# Altium PCB 2113A_DeElectronique.PcbDoc
Units mm, origin at the board's own origin, x right, y up, seen from the top; angles counter-clockwise.
Board outline 70 x 49 mm, 2 copper layers (Top Layer, Bottom Layer); 36 components, 32 nets, 120 pads, 28 vias.
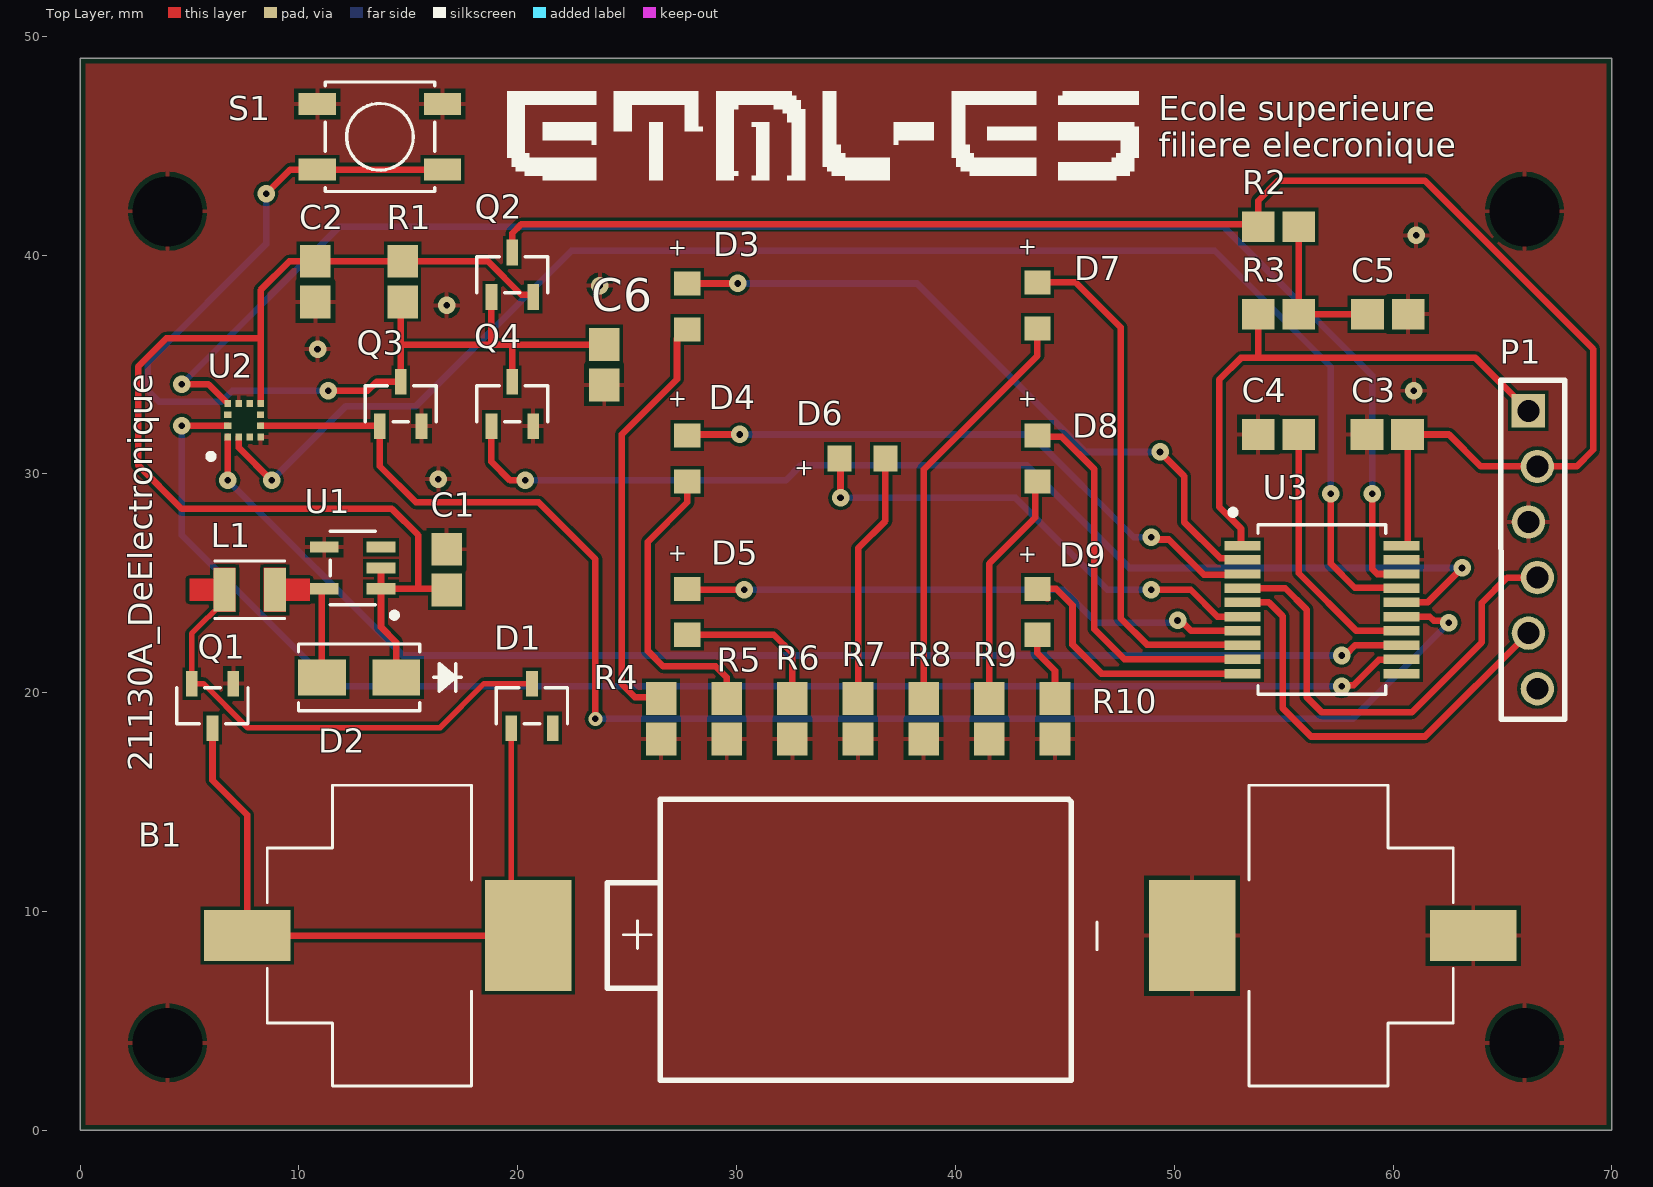
[diagram p0: Top Layer view]
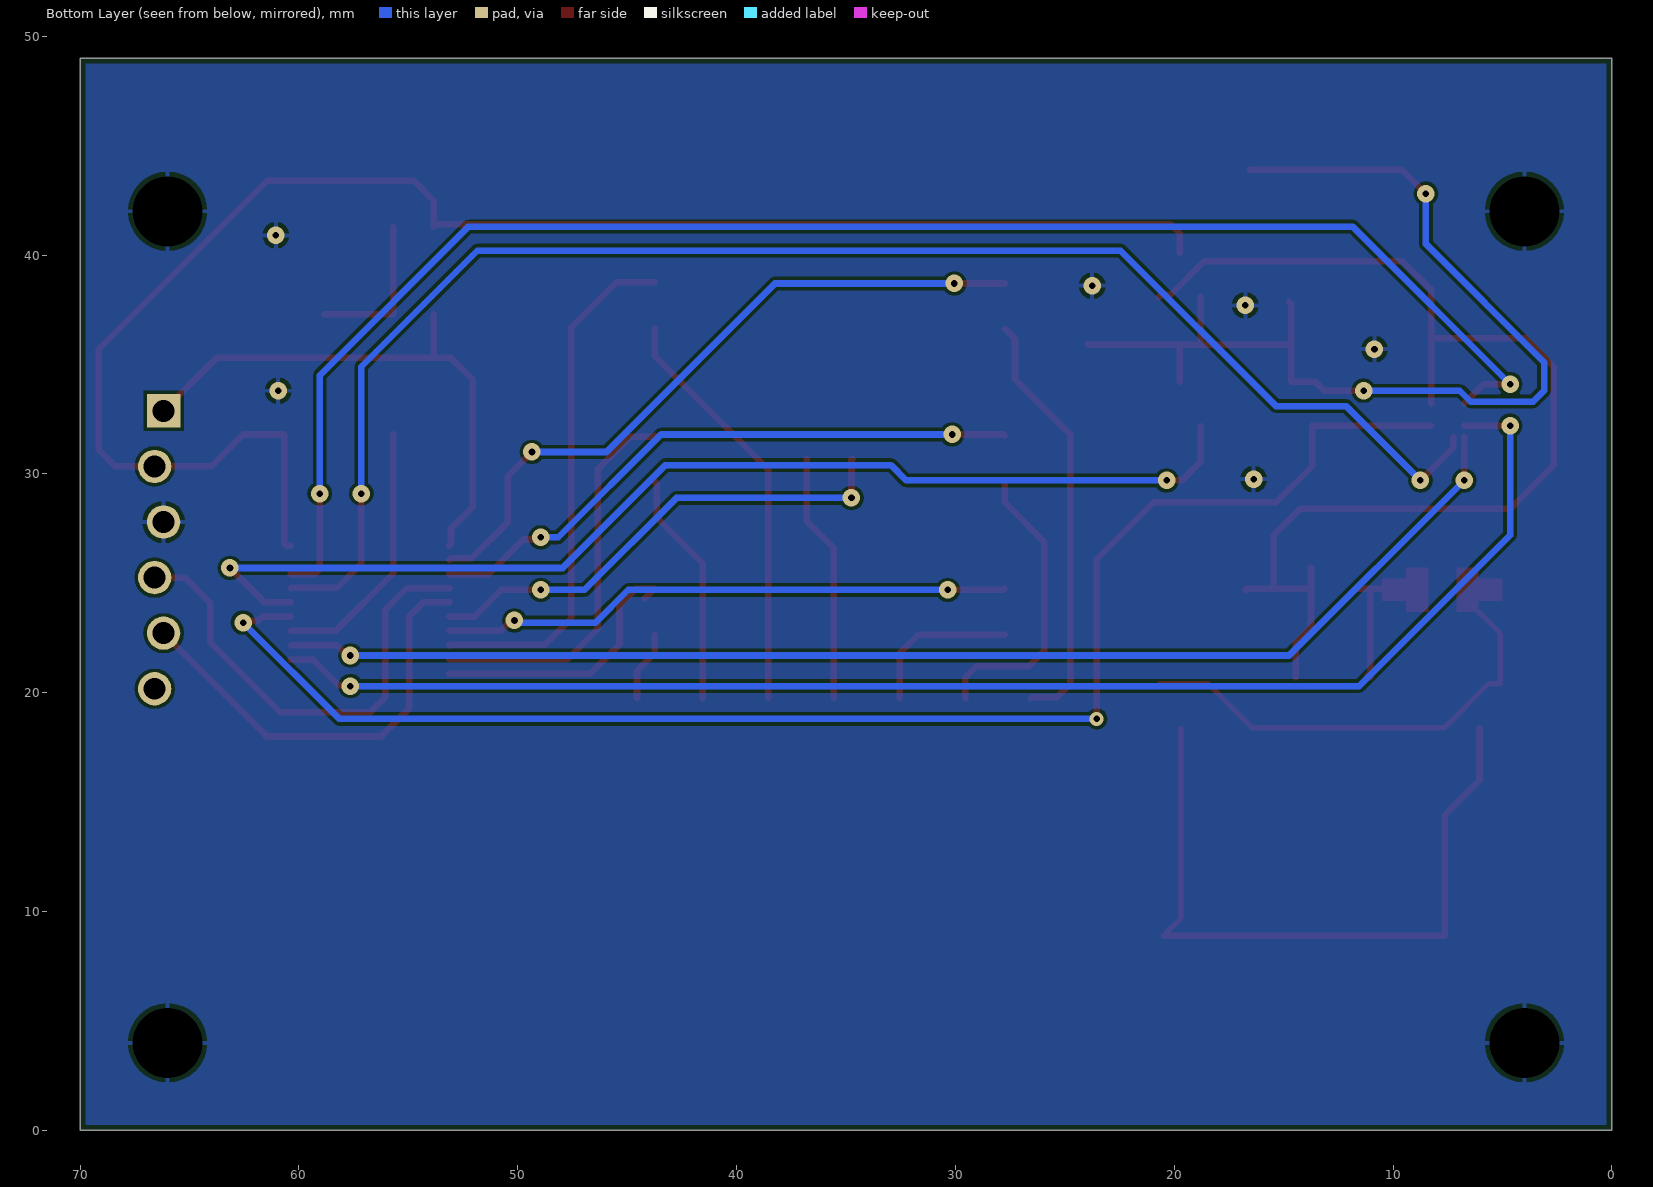
[diagram p1: Bottom Layer view, seen from below]

## Layer stack, top to bottom
Top Solder: solder mask 0.0102, Solder Resist, Dk 3.5
Top Layer: signal copper 0.0356
Dielectric 1: dielectric 0.32, FR-4, Dk 4.8
Bottom Layer: signal copper 0.0356
Bottom Solder: solder mask 0.0102, Solder Resist, Dk 3.5

## Board outline
0,0 70,0 70,49 0,49

## Design rules (kind name [scope] priority, off if disabled: settings)
BoardOutlineClearance [All] p1: gap=0.25 ignorepadtopadclearanceinfootprint=FALSE except(0: Arc-SplitContinuation Track-SplitContinuation SMDPad-SplitContinuation THPad-SplitContinuation Via-SplitContinuation Fill-SplitContinuation Poly-SplitContinuation Region-SplitContinuation Text-SplitContinuation)
Clearance Clearance-xPP-xTP-xTT [All] p1: gap=0.15 ignorepadtopadclearanceinfootprint=FALSE except(0: Arc-Hole Track-Hole SMDPad-Hole THPad-Hole Via-Hole Fill-Hole Poly-Hole Region-Hole Text-Hole)
ComponentClearance [All] p1: gap=0.25 collisioncheckmode=3 verticalgap=0.25 showdistances=FALSE
DiffPairsRouting [All] p1: maxlimit=0.25 minlimit=0.25 mostfreqgap=0.25 toplayer_minwidth=0.381 toplayer_maxwidth=0.381 toplayer_prefwidth=0.381 bottomlayer_minwidth=0.381 bottomlayer_maxwidth=0.381 bottomlayer_prefwidth=0.381 maxuncoupledlength=12.5
Height [All] p1: minheight=0 maxheight=25 prefheight=12.5
HoleSize HoleSize-PTH [All] p1: absolutevalues=TRUE maxlimit=10 minlimit=0.25 maxpercent=80.000 minpercent=20.000
HoleToHoleClearance [All] p1: gap=0.35 allowstackedmicrovias=TRUE
MinimumAnnularRing "Minimum IAR  >0.45mm" [((ObjectKind = 'Pad') OR (ObjectKind = 'Via')) And (Layer = 'MultiLayer') And (HoleDiameter > AsMM(0.45))] p1: minimumring=0.175 // minimum inner annular ring for pads > 0.45mm finished hole size
MinimumAnnularRing "Minimum IAR <=0.45mm" [((ObjectKind = 'Pad') OR (ObjectKind = 'Via')) And (Layer = 'MultiLayer') And (HoleDiameter <= AsMM(0.45))] p2: minimumring=0.175 // minimum inner annular ring for pads <= 0.45mm finished hole size
MinimumSolderMaskSliver [All] p1: minsoldermaskwidth=0.08
PlaneClearance PlaneClearance-IPI [All] p1: clearance=0.25
PlaneConnect [All] p1: planeconnectstyle=Relief reliefexpansion=0.175 reliefentries=4 reliefconductorwidth=0.2 reliefairgap=0.2
PolygonConnect PolygonConnect-xTW [All] p1: connectstyle=Relief reliefconductorwidth=0.2 reliefentries=4 polygonreliefangle="90 Angle" airgapwidth=0.2
RoutingCorners [All] p1: cornerstyle=45-Degree minsetback=2.5 maxsetback=2.5
RoutingVias RoutingViasES [All] p1: holewidth=0.3 width=0.65 viastyle="Through Hole" minholewidth=0.25 minwidth=0.61 maxholewidth=0.45 maxwidth=0.8 // finishet hole size <= 0.45mm
SilkToSilkClearance [All] p1: silktosilkclearance=0.2
SilkToSolderMaskClearance SilkscreenOverComponentPads [IsPad] p1: minsilkscreentomaskgap=0.2 clearancetoexposedcopper=TRUE
SolderMaskExpansion [All] p1: expansion=0 istentingtop=FALSE
UnRoutedNet [All] p1: checkbadconnections=TRUE
Width Width-xTW [All] p1: maxlimit=1.5 minlimit=0.15 preferedwidth=0.2
18 further rules are at their usual default settings.

## Components (designator, comment, footprint, x,y, rotation, side; value= is the part's Value field where it differs from the comment)
B1 "BK-53" BK-53 35.65,8.9 r90 top
C1 "2.2uF" CONDO_0805 16.75,25.64 r90 top
C2 "100nF" CONDO_0805 10.75,38.775 r270 top
C3 "100nF" CONDO_0805 59.75,31.8 r0 top
C4 "10uF" CONDO_0805 54.75,31.8 r180 top
C5 "100nF" CONDO_0805 59.75,37.3 r180 top
C6 "10uF" Condo_0805 23.95,35 r90 top
D1 "BAT54_R1_00001" SOT23-3 20.65,19.4 r0 top
D2 "SS13-E3/61T" DO-214AC 12.75,20.7 r180 top
D3 "LED" LED_0805 27.751,37.651 r90 top
D4 "LED" LED_0805 27.75,30.7 r90 top
D5 "LED" LED_0805 27.75,23.7 r90 top
D6 "LED" LED_0805 35.75,30.7 r180 top
D7 "LED" LED_0805 43.75,37.7 r90 top
D8 "LED" LED_0805 43.75,30.7 r90 top
D9 "LED" LED_0805 43.75,23.7 r90 top
L1 "560uH" "self 1206 (3225)" 7.75,24.7 r180 top
P1 "Tac_Contact_Prog" TAC_CONTACT_PROG 66.185,32.88 r0 top
Q1 "PMV160UP,215" SOT23-3 6.05,19.4 r180 top
Q2 "PMV160UP,215" SOT23-3 19.75,39.1 r0 top
Q3 "DMN2114SN-7" SOT23-3 14.65,33.2 r0 top
Q4 "DMN2114SN-7" SOT23-3 19.75,33.2 r0 top
R1 "100k" RES_0805 14.75,38.8 r90 top
R2 "10k" RES_0805 54.75,41.3 r180 top
R3 "1k" RES_0805 54.75,37.3 r180 top
R4 "560" RES_0805 26.55,18.8 r270 top
R5 "560" RES_0805 29.55,18.8 r270 top
R6 "560" RES_0805 32.55,18.8 r270 top
R7 "560" RES_0805 35.55,18.8 r270 top
R8 "560" RES_0805 38.55,18.8 r270 top
R9 "560" RES_0805 41.55,18.8 r270 top
R10 "560" RES_0805 44.55,18.8 r270 top
S1 "PTS647SN50SMTR2LFS" PTS647SN50SMTR2LFS 13.7,45.405 r0 top
U1 "R1210N331D-TR-FE" SOT23-5 12.455,25.7 r180 top
U2 "MC3419" MC3419 7.499,32.45 r90 top
U3 "PIC32MM0064GPL020-I/SS" SSOP20_SS_MCH 56.75,23.8 r0 top

## Footprints (in the part's own frame and the unit in brackets; to place one, negate y for a bottom-side part, rotate by r counter-clockwise, add the part's x,y. Pads: shape width x height; smd on the part's side, far side on the other; paste and mask are expansions set on the pad)
BK-53 [mm]
  rect 2.34x3.96 smd: 1+(0,28.015) 2-(0,-28.015)
  rect 5.08x3.96 smd: 1-(0,-15.165) 2+(0,15.165)
  silkscreen extent -6.88,-27.1 6.88,27.1, body extent -6.88,-30.21 6.88,30.34, height 15.59
CONDO_0805 [mm]
  rect 1.5x1.4 smd: 1(-0.94,0) 2(0.914,0)
  body extent -1.1,-0.72 1.1,0.72, height 1.4
Condo_0805 [mm]
  rect 1.5x1.4 smd: 1(-0.94,0) 2(0.914,0)
  body extent -1.1,-0.72 1.1,0.72, height 1.4
DO-214AC [mil] "DO-214AC"
  rect 86x65 smd: 1(-67,0) 2(67,0)
  silkscreen extent -184,-60 109,60
LED_0805 [mm]
  rect 1.1x1.2 smd: 1(-1.051,0.001) 2(1.049,0.001)
  body extent -1,-0.62 1,0.63, height 0.7
MC3419 [mil] "Accéléromètres Small Digital 3-axis Accelerometer Sensor"
  rect 13x12 smd: 1(-30,29.53) 2(-30,9.84) 3(-30,-9.84) 4(-30,-29.53) 7(30,-29.53) 8(30,-9.84) 9(30,9.84) 10(30,29.53)
  rect 12x13 smd: 5(-9.84,-29.5) 6(9.84,-29.5) 11(9.84,29.5) 12(-9.84,29.5)
  silkscreen extent -70,55 -60,65, body extent -39,-39 39,39, height 39
PTS647SN50SMTR2LFS [mil] "Interrupteurs de contact 50mA 12VDC, 1.0N 5.0mm H, G leads"
  rect 67x39 smd paste+0 mask+0: 1(-112.49,59.06) 2(112.51,59.06) 3(-112.49,-59.05) 4(112.51,-59.05)
  silkscreen extent -98,-98 99,99, body extent -126,-88 130,90, height 197
RES_0805 [mm]
  rect 1.5x1.4 smd: 1(-0.94,0) 2(0.914,0)
  body extent -1.1,-0.72 1.1,0.72, height 1.4
"self 1206 (3225)" [mm] "Inductance fixes 560uH 10%"
  rect 1x2 smd: 1(-1.15,0) 2(1.15,0)
  Top Layer region: -0.65,-1 -1.65,-1 -1.65,-0.5 -2.75,-0.5 -2.75,0.5 -1.65,0.5 -1.65,1 -0.65,1
  Top Layer region: 1.65,0.5 2.75,0.5 2.75,-0.5 1.65,-0.5 1.65,-1 0.65,-1 0.65,1 1.65,1
  silkscreen extent -1.6,-1.31 1.6,1.31, body extent -1.6,-1.28 1.6,1.22, height 2.2
SOT23-3 [mil]
  rect 21x46 smd: 1(-37.5,-40) 2(37.5,-40) 3(0,40)
  silkscreen extent -64,-32 64,32, body extent -59,-49 59,49, height 43
SOT23-5 [mil]
  rect 52x20 smd: 1(-51,37.4) 2(-51,0) 3(-51,-37.4) 4(51,-37.4) 5(51,37.4)
  silkscreen extent -80,-66 41,90, body extent -63,-61 63,61, height 57
SSOP20_SS_MCH [mil]
  rect 65x17 smd: 1(-143,115.16) 2(-143,89.57) 3(-143,63.98) 4(-143,38.39) 5(-143,12.8) 6(-143,-12.8) 7(-143,-38.39) 8(-143,-63.98) 9(-143,-89.57) 10(-143,-115.16) 11(143,-115.16) 12(143,-89.57) 13(143,-63.98) 14(143,-38.39) 15(143,-12.8) 16(143,12.8) 17(143,38.39) 18(143,63.98) 19(143,89.57) 20(143,115.16)
  silkscreen extent -165,-152 115,180, body extent -161,-147 162,147, height 79
TAC_CONTACT_PROG [mil]
  rect 60x60 hole 39.37: 1(0,0)
  round 60 hole 39.37: 2(16,-100) 3(0,-200) 4(16,-300) 5(0,-400) 6(16,-500)
  silkscreen extent -50,-555 65,55

## Part data
B1: "BATT CONTACT CLIP AA 1 CELL SMD", Manufacturer="MPD (Memory Protection Devices)", ManufacturerPart=BK-53, Supplier=Digi-Key, SupplierPart=BK-53-ND
C1: library part Condensateur_Pol, Manufacturer="Samsung Electro-Mechanics", ManufacturerPart=CL21B225KPFNNNG, Supplier=Mouser, SupplierPart=187-CL21B225KPFNNNG
C2 C3 C5: library part Condensateur, Manufacturer=KEMET, ManufacturerPart=C0805C104K5RAC7411, Supplier=Mouser, SupplierPart=80-C0805C104K5RACLR
C4 C6: library part Condensateur, Manufacturer="Samsung Electro-Mechanics", ManufacturerPart=CL21A106KOCLRNC, Supplier=Mouser, SupplierPart=187-CL21A106KOCLRNC
D1: Manufacturer=Panjit, ManufacturerPart=BAT54_R1_00001, Supplier=Mouser, SupplierPart=241-BAT54_R1_00001
D2: library part Schottky, Manufacturer=Vishay, ManufacturerPart=SS13-E3/61T, Supplier=Mouser, SupplierPart=625-SS13-E3
D3 D4 D5 D6 D7 D8 D9: "DEL standard - CMS 2.0X1.2MM LOW CRNT", Manufacturer=Kingbright, ManufacturerPart=APT2012LSECK/J3-PRV, Supplier=Mouser, SupplierPart=604-APT2012LSECKJ3RV
L1: library part Self, Manufacturer="Murata Electronics", ManufacturerPart=LQH32CN561K23L, Supplier=Mouser, SupplierPart=81-LQH32CN561K23L
P1: "Tac contact pour programmation"
Q1 Q2: library part MOSFET-P, Manufacturer=Nexperia, ManufacturerPart=PMV160UP,215, Supplier=Mouser, SupplierPart=771-PMV160UP215
Q3 Q4: library part MOSFET-N, Manufacturer="Diodes Incorporated", ManufacturerPart=DMN2114SN-7, Supplier=Mouser, SupplierPart=621-DMN2114SN-7
R1: library part Résistance, Manufacturer="Vishay / Beyschlag", ManufacturerPart=MCS04020D1003BE000, Supplier=Mouser, SupplierPart=594-MCS04020D1003BE0
R2: library part Résistance, Manufacturer="Stackpole Electronics Inc", ManufacturerPart=RMCF0805JT10K0, Supplier=Digi-Key, SupplierPart=RMCF0805JT10K0CT-ND
R3: library part Résistance, Manufacturer="Stackpole Electronics Inc", ManufacturerPart=RNCP0805FTD1K00, Supplier=Digi-Key, SupplierPart=RNCP0805FTD1K00CT-ND
R4 R5 R6 R7 R8 R9 R10: library part Résistance, Manufacturer=Panasonic, ManufacturerPart=ERA-6AED561V, Supplier=Mouser, SupplierPart=667-ERA-6AED561V
S1: library part Bouton, "Interrupteurs de contact 50mA 12VDC, 1.0N 5.0mm H, G leads", Manufacturer=C&K, ManufacturerPart=PTS647SN50SMTR2LFS, Supplier=Mouser, SupplierPart=611-PTS647SN50SMTR2L
U1: "Régulateurs de tension de commutation 8V Input PWM Step-up DCDC Converter", Manufacturer="Ricoh Electronic Devices Company", ManufacturerPart=R1210N331D-TR-FE, Supplier=Digi-Key, SupplierPart=2129-R1210N331D-TR-FECT-ND
U2: "Accéléromètres Small Digital 3-axis Accelerometer Sensor", Manufacturer=MEMSIC, ManufacturerPart=MC3419, Supplier=Mouser, SupplierPart=498-MC3419
U3: "Microcontrôleurs 32 bits - MCU 8KB RAM 79 Power microMIPS", Manufacturer=MicroChip, ManufacturerPart=PIC32MM0064GPL020-I/SS, Supplier=Mouser, SupplierPart=579-MM0064GPL020ISS

## Free pads (board coordinates)
  round 0 hole 3.2: 1(66,4) 2(4,4) 3(4,42) 4(66,42)

## Via types
v1: diameter 0.8, hole 0.3, Top Layer to Bottom Layer, 27 vias
v2: diameter 0.65, hole 0.3, Top Layer to Bottom Layer, 1 vias

## Nets (pads, with @x,y where several pads share a name; then routed paths per layer and width w, separated by ;. In a path a pad name is that pad's centre, name@x,y a point inside that pad or via, vN(x,y) a via of type N, cw(c..) or ccw(c..) an arc to the next point about the centre after c; other vN are vias at no path point)
GND: B1.1- B1.2- C1.2 C2.2 C3.1 C4.2 C5.1 C6.1 P1.3 pad.1 pad.2 pad.3 pad.4 Q1.1 Q3.2 Q4.2 R4.2 R5.2 R6.2 R7.2 R8.2 R9.2 R10.2 S1.1 S1.2 U1.4 U2.4 U2.9 U3.19
  other v1: 16.373,29.758 60.95,33.8 10.85,35.7 16.75,37.7 23.75,38.6 61.05,40.9
NetC4_1: C4.1 U3.14 | length 12.1
  Top Layer w0.3: C4.1 55.69,25.46 58.325,22.825 U3.14
NetC5_2: C5.2 R2.1 R3.1 | length 7.1
  Top Layer w0.3: R2.1 R3.1 C5.2
NetC6_2: C6.2 Q2.1 Q3.3 Q4.3 R1.1 S1.3 S1.4 | length 48.8
  Top Layer w0.3: v1(8.5,42.8) 9.605,43.905 S1.3 S1.4 ; v1(11.35,33.8) 13.15,33.8 13.55,34.2 14.634,34.2 Q3.3 14.65,35.9 ; R1.1 14.65,37.76 14.65,35.9 ; Q2.1 18.798,35.9 ; Q4.3 19.75,35.8 19.65,35.9 ; C6.2 23.936,35.9 19.65,35.9 ; 14.65,35.9 18.798,35.9 ; 18.798,35.9 19.45,35.9 19.65,35.9
  Bottom Layer w0.3: v1(8.5,42.8) 8.5,40.5 3.1,35.1 3.1,33.8 3.6,33.3 6.45,33.3 6.95,33.8 v1(11.35,33.8)
NetD1_3: D1.3 L1.2 Q1.2 | length 22.1
  Top Layer w0.254: L1.2 6.6,24.2 5.098,22.698 Q1.2 5.634,20.416 7.65,18.4 16.45,18.4 18.466,20.416 D1.3
  Top Layer w0.3: L1.2@6.836,24.7 L1.2@6.85,24.686
NetD2_2: D2.2 L1.1 U1.5 | length 7.1
  Top Layer w0.3: L1.1@8.69,24.7 8.74,24.75 U1.5@11.152,24.75 ; D2.2@11.148,20.8 D2.2 11.048,24.646 U1.5@11.152,24.75 ; U1.5@11.566,24.75 U1.5 U1.5@11.152,24.75
NetD3_1: D3.1 R4.1 | length 19.5
  Top Layer w0.3: R4.1 26.49,19.8 25.35,19.8 24.75,20.4 24.75,31.8 27.277,34.327 27.277,36.177 27.7,36.6 D3.1
NetD3_2: D3.2 U3.2 | length 31.8
  Top Layer w0.3: D3.2 v1(30.05,38.7) ; v1(49.35,31) 50.45,29.9 50.45,27.8 52.11,26.14 53.053,26.14 U3.2
  Bottom Layer w0.3: v1(30.05,38.7) 38.25,38.7 45.95,31 v1(49.35,31)
NetD4_1: D4.1 R5.1 | length 13.6
  Top Layer w0.3: D4.1 27.749,28.699 25.95,26.9 25.95,21.9 26.65,21.2 29.05,21.2 29.55,20.7 R5.1
NetD4_2: D4.2 U3.3 | length 28.1
  Top Layer w0.3: D4.2 27.801,31.8 v1(30.15,31.8) ; v1(48.95,27.1) 49.048,27.002 49.748,27.002 51.35,25.4 53.093,25.4 U3.3
  Bottom Layer w0.3: v1(30.15,31.8) 43.45,31.8 48.15,27.1 v1(48.95,27.1)
NetD5_1: D5.1 R6.1 | length 7.2
  Top Layer w0.3: D5.1 31.701,22.649 32.55,21.8 R6.1
NetD5_2: D5.2 U3.7 | length 26.3
  Top Layer w0.3: D5.2 27.798,24.7 v1(30.35,24.7) ; v1(50.15,23.3) 50.298,23.3 50.773,22.825 U3.7
  Bottom Layer w0.3: v1(30.35,24.7) 44.95,24.7 46.45,23.2 50.05,23.2 v1@50.12,23.27 ; v1@50.125,23.266 50.15,23.291 v1(50.15,23.3)
NetD6_1: D6.1 R7.1 | length 11.5
  Top Layer w0.3: R7.1 35.55,26.6 36.801,27.851 D6.1
NetD6_2: D6.2 U3.6 | length 22.4
  Top Layer w0.3: D6.2 34.75,30.651 v1(34.75,28.9) ; v1(48.95,24.7) 50.75,24.7 51.975,23.475 U3.6
  Bottom Layer w0.3: v1(34.75,28.9) 42.75,28.9 46.95,24.7 v1(48.95,24.7)
NetD7_1: D7.1 R8.1 | length 19.1
  Top Layer w0.3: R8.1 38.55,30.2 43.749,35.399 D7.1
NetD7_2: D7.2 U3.8 | length 24
  Top Layer w0.3: D7.2 45.501,38.749 47.55,36.7 47.55,23.4 48.75,22.2 53.093,22.2 U3.8
NetD8_1: D8.1 R9.1 | length 10.8
  Top Layer w0.3: R9.1 41.55,25.9 43.65,28 43.65,29.549 D8.1
NetD8_2: D8.2 U3.9 | length 17.9
  Top Layer w0.3: D8.2 43.798,31.7 44.85,31.7 46.35,30.2 46.35,22.9 47.725,21.525 U3.9
NetD9_1: D9.1 R10.1 | length 3.2
  Top Layer w0.3: D9.1 43.749,21.801 44.55,21 R10.1
NetD9_2: D9.2 U3.10 | length 12.7
  Top Layer w0.3: D9.2@44.222,24.326 44.172,24.326 D9.2 44.601,24.749 45.35,24 45.35,22.2 46.675,20.875 U3.10
NetP1_1: P1.1 R3.2 U3.1 | length 25.6
  Top Layer w0.3: U3.1 53.118,26.746 53.05,26.814 53.05,27.5 52.05,28.5 52.05,34.3 53.05,35.3 53.836,35.3 ; R3.2 53.836,35.3 ; P1.1 63.765,35.3 53.836,35.3
NetP1_4: P1.4 U3.4 | length 21.8
  Top Layer w0.3: U3.4 55.075,24.775 56.05,23.8 56.05,19.8 56.75,19.1 60.85,19.1 64.05,22.3 64.05,24.1 65.21,25.26 P1.4
NetP1_5: P1.5 U3.5 | length 20
  Top Layer w0.3: U3.5 54.325,24.125 54.95,23.5 54.95,19.3 56.25,18 61.465,18 P1.5
NetQ3_1: Q3.1 U2.5 U3.15 | length 69.4
  Top Layer w0.3: U2.5 8.57,32.2 13.682,32.2 Q3.1 13.698,30.352 15.35,28.7 20.95,28.7 23.55,26.1 v2(23.55,18.8) ; U3.15 61.675,23.475 61.854,23.296 62.454,23.296 v1(62.55,23.2)
  Bottom Layer w0.3: v2(23.55,18.8) 58.15,18.8 62.494,23.144 62.616,23.144 62.561,23.2 v1(62.55,23.2)
NetQ4_1: Q4.1 U3.16 | length 52
  Top Layer w0.3: Q4.1 18.798,30.553 19.65,29.7 v1(20.35,29.7) ; U3.16 61.575,24.125 v1(63.15,25.7)
  Bottom Layer w0.3: v1(20.35,29.7) 32.25,29.7 32.95,30.4 43.25,30.4 47.95,25.7 v1(63.15,25.7)
NetU2_1: U2.1 U3.13 | length 59.1
  Top Layer w0.3: v1(6.75,29.7) U2.1@6.75,31.688 ; v1(57.65,21.7) 57.798,21.7 58.273,22.175 U3.13
  Bottom Layer w0.3: v1(6.75,29.7) 14.75,21.7 v1(57.65,21.7)
NetU2_2: U2.2 U3.17 | length 70.4
  Top Layer w0.3: U2.2@7.258,31.68 7.258,31.192 v1(8.75,29.7) ; v1(57.15,29.1) 57.15,29 57.05,28.9 57.098,28.9 57.15,28.848 57.15,25.9 58.25,24.8 60.357,24.8 U3.17
  Bottom Layer w0.3: v1(8.75,29.7) 12.15,33.1 15.35,33.1 22.45,40.2 51.85,40.2 57.15,34.9 v1(57.15,29.1)
NetU2_10: U2.10 U3.18 | length 72.9
  Top Layer w0.3: v1(4.65,34.1) 5.861,34.1 6.711,33.25 6.724,33.25 6.749,33.225 U2.10 ; v1(59.05,29.1) 59.05,25.65 59.275,25.425 U3.18
  Bottom Layer w0.3: v1(4.65,34.1) 11.85,41.3 52.25,41.3 59.05,34.5 v1(59.05,29.1)
NetU2_12: U2.12 U3.12 | length 66.2
  Top Layer w0.3: v1(4.65,32.2) U2.12 ; v1(57.65,20.3) 57.698,20.348 58.198,20.348 59.35,21.5 60.357,21.5 U3.12
  Bottom Layer w0.3: v1(4.65,32.2) 4.65,27.2 11.55,20.3 v1(57.65,20.3)
VBat: B1.1+ B1.2+ D1.1 Q1.3 | length 32.8
  Top Layer w0.254: D1.1 19.698,9.688 B1.2+
  Top Layer w0.3: Q1.3 6.05,16 7.635,14.415 B1.1+ B1.2+
VCC: C1.1 C2.1 D2.1 Q2.2 R1.2 U1.1 U1.2 U2.7 | length 54.4
  Top Layer w0.3: U2.7 8.25,36.2 ; U1.2 U1.1 ; D2.1 14.45,20.702 14.45,22.3 13.75,23 U1.1 ; C1.1 16.74,24.69 16.68,24.75 15.45,24.75 ; Q2.2 20.598,38.188 20.162,38.188 18.636,39.714 R1.2 C2.1 9.564,39.714 8.25,38.4 8.25,36.2 ; 8.25,36.2 3.95,36.2 2.65,34.9 2.65,30.4 4.65,28.4 14.25,28.4 15.45,27.2 15.45,24.75 ; U1.1 15.45,24.75
VDD: C3.2 P1.2 Q2.3 R2.2 U3.20 | length 74.6
  Top Layer w0.3: Q2.3 19.75,41 20.15,41.4 53.736,41.4 R2.2 53.836,42.486 54.75,43.4 61.45,43.4 69.15,35.7 69.15,31.1 68.39,30.34 P1.2 64.01,30.34 62.55,31.8 C3.2 60.664,26.814 60.576,26.725 U3.20
pads on no net: D1.2 P1.6 U1.3 U2.3 U2.6 U2.8 U2.11 U3.11

## Polygon pours and split planes (outlines as drawn)
GND on Bottom Layer "GND_L02_P001" (solid, pour order 1): 0,49 70,49 70,0 0,0
GND on Top Layer "GND_L01_P000" (solid, pour order 0): 0,49 70,49 70,0 0,0

## Silkscreen, mask and mechanical layers (free items; w line width, h text height)
Top Overlay:
  drawing of 12 lines, arcs and shapes, not listed
  text "Ecole superieure / filiere elecronique" at 49.3,44.5 h1.1
  text "21130A_DeElectronique" at 3.3,16.4 h1.1 r90
Mechanical 27:
  the board outline again, w0.254

## Text inside footprints (layer, text, board x,y; h text height)
D3: Top Overlay "+" at 27.751,40.651 h0.76 r180
D4: Top Overlay "+" at 27.749,33.749 h0.76 r180
D5: Top Overlay "+" at 27.75,26.7 h0.76 r180
D6: Top Overlay "+" at 32.75,30.7 h0.76 r270
D7: Top Overlay "+" at 43.75,40.7 h0.76 r180
D8: Top Overlay "+" at 43.749,33.749 h0.76 r180
D9: Top Overlay "+" at 43.749,26.649 h0.76 r180